# Altium PCB Inverter_Control.PcbDoc (part 1 of 2)
Units mm, origin at the board's own origin, x right, y up, seen from the top; angles counter-clockwise.
Board outline 150 x 40 mm, 4 copper layers (TOP, GND, PWR, BOT), stack 1.44 mm thick; 99 components, 92 nets, 378 pads, 6 vias.
Unrouted connection lines stored in the file: 133.
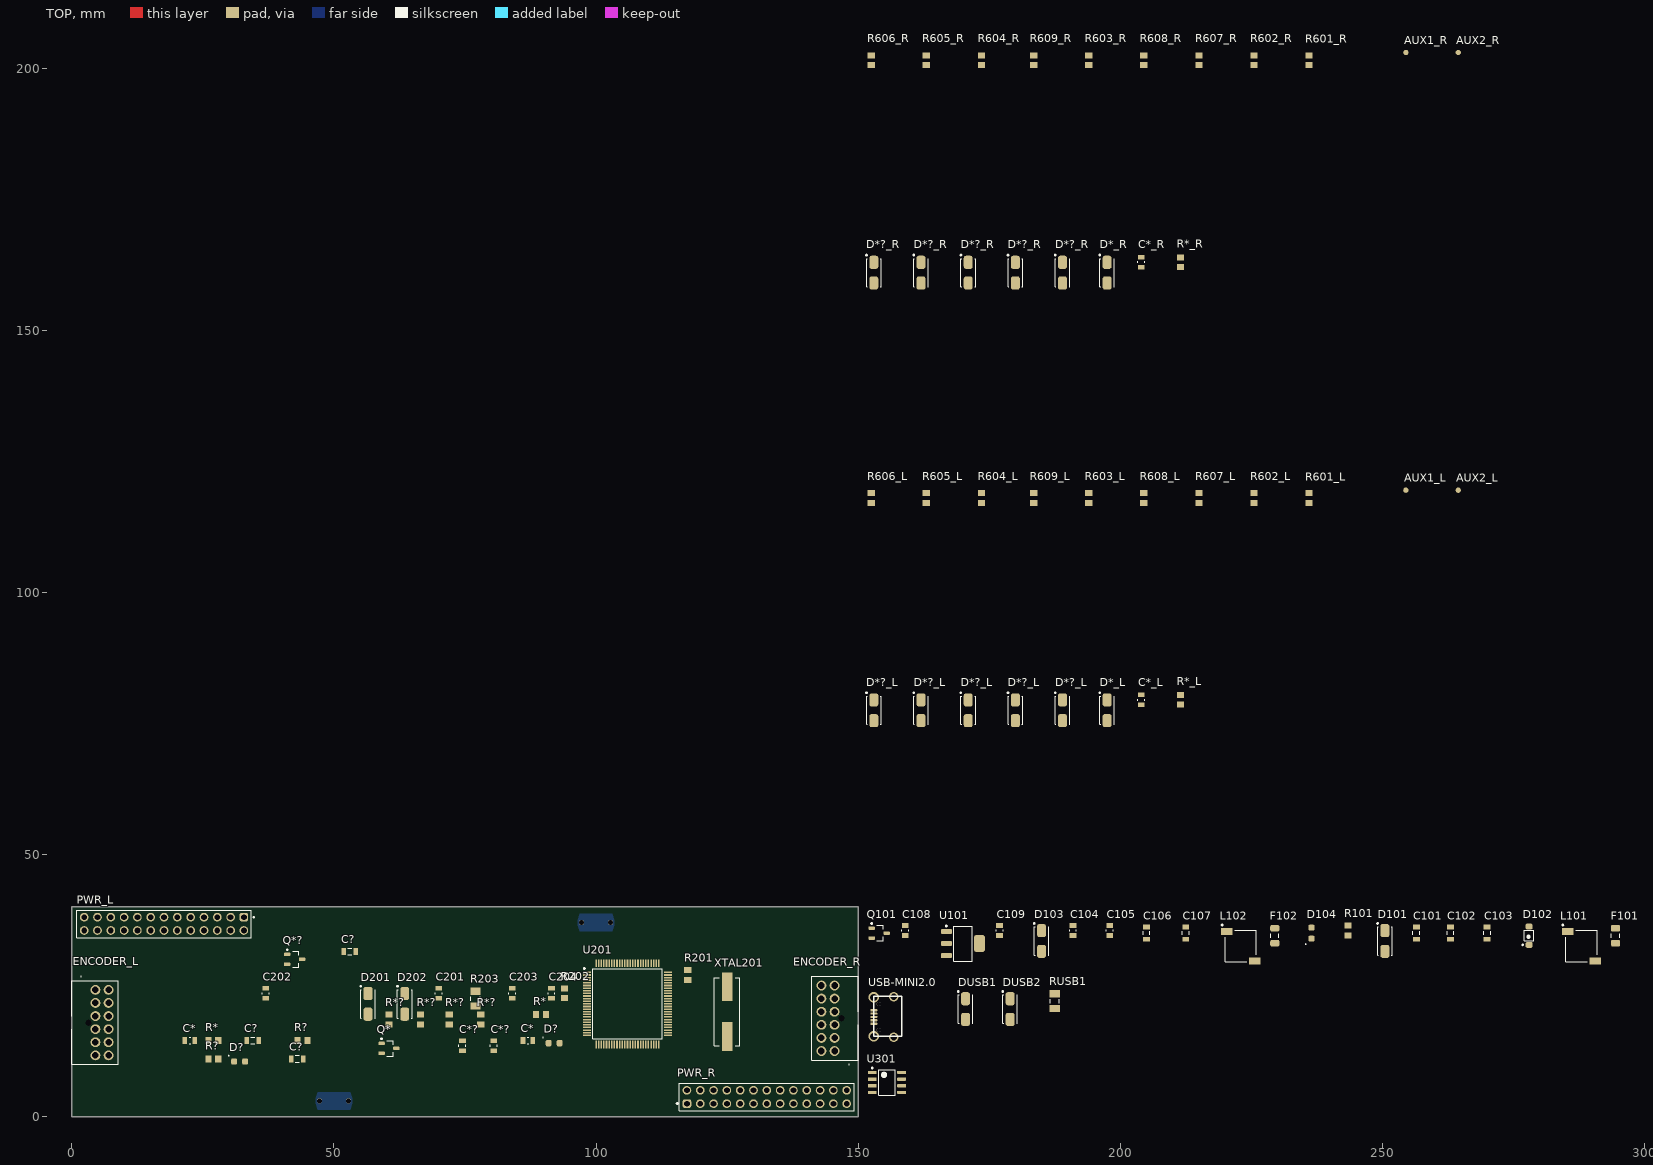
[diagram p0: TOP view]
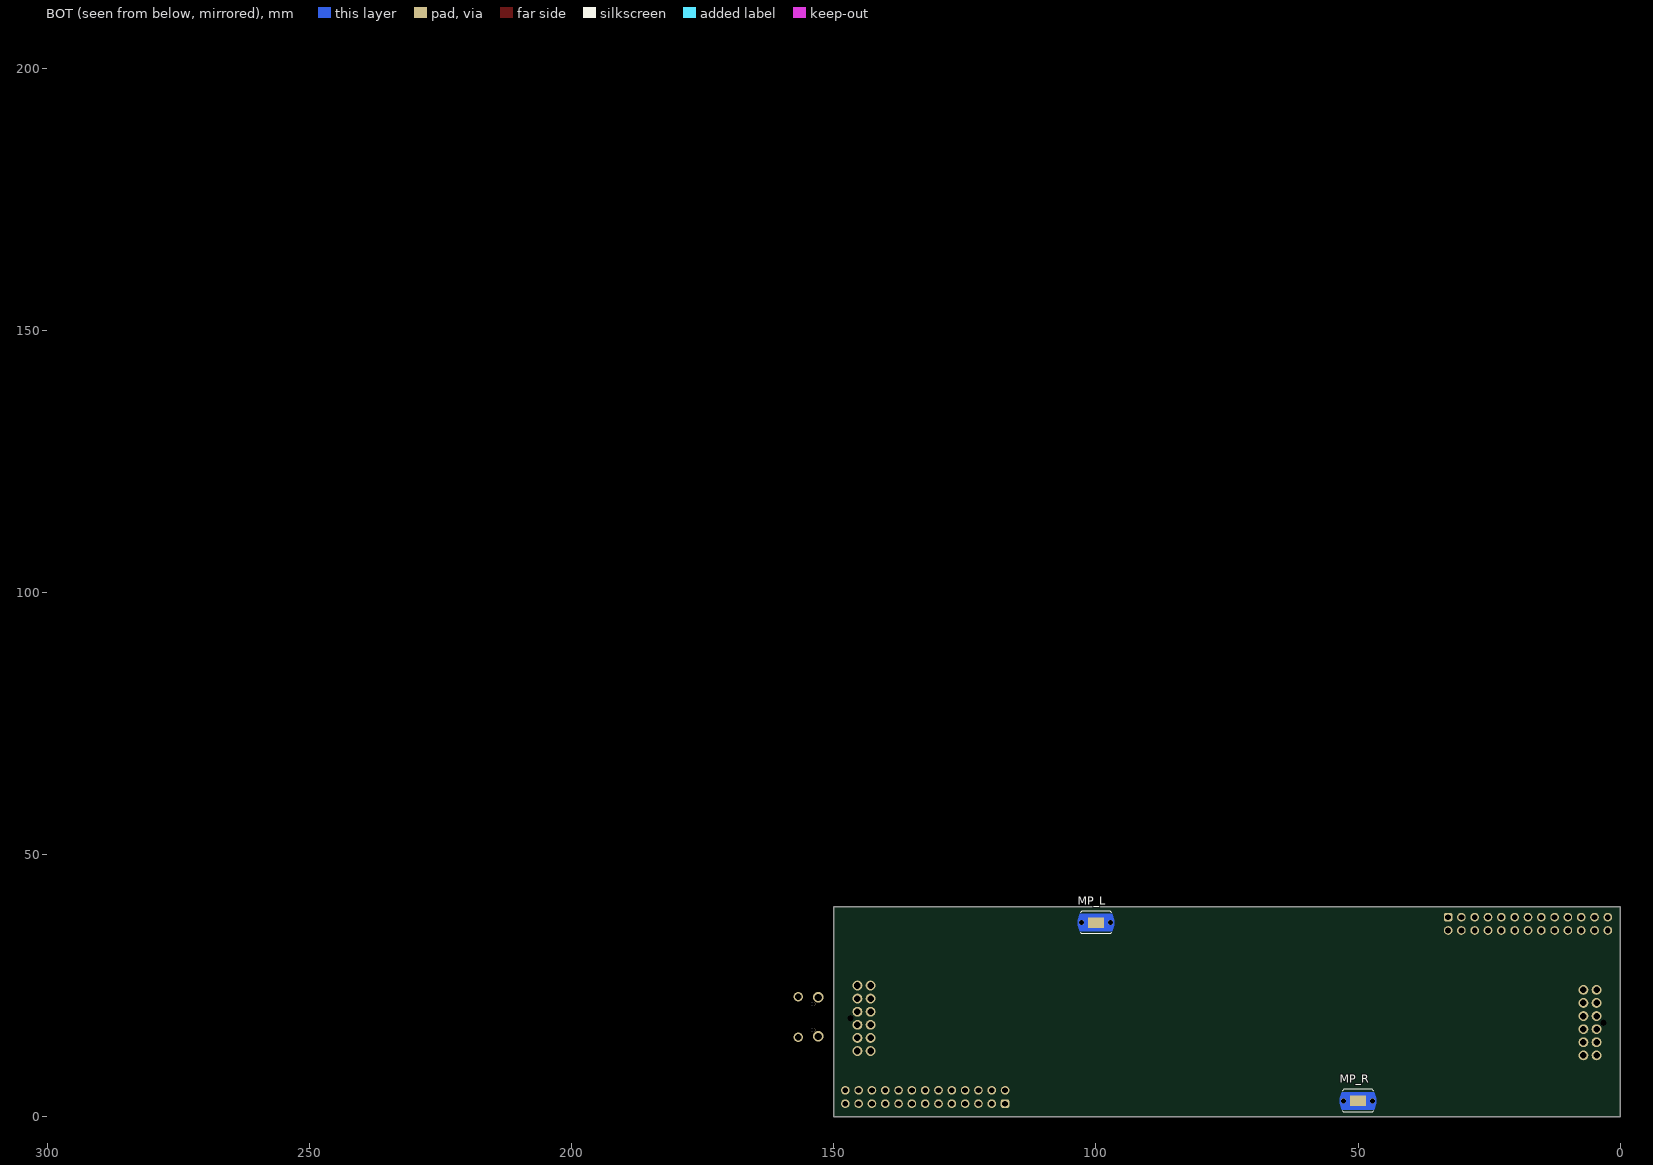
[diagram p1: BOT view, seen from below]

## Layer stack, top to bottom
Top Solder: solder mask 0.01, Solder Resist, Dk 3.5
TOP: signal copper 0.035
Dielectric 2: prepreg 0.1, PP-006, Dk 4.1
Dielectric 4: prepreg 0.1, PP-006, Dk 4.1
GND: signal copper 0.035
Dielectric 1: dielectric 0.9, FR-4, Dk 4.8
PWR: signal copper 0.035
Dielectric 5: prepreg 0.1, PP-006, Dk 4.1
Dielectric 3: prepreg 0.1, PP-006, Dk 4.1
BOT: signal copper 0.035
Bottom Solder: solder mask 0.01, Solder Resist, Dk 3.5

## Board outline
0,0 0,40 150,40 150,0

## Design rules (kind name [scope] priority, off if disabled: settings)
Clearance Clearance_TS [InNet('TS+') OR InNet('TS-') OR InNet('A_in') OR InNet('B_in') OR InNet('C_in') OR InNet('NetCsn_HS_A_1') OR InNet('NetCsn_HS_B_1') OR InNet('NetCsn_HS_C_1') OR InNet('NetCsn_LS_A_1') OR InNet('NetCsn_LS_B_1') OR InNet('NetCsn_LS_C_1') OR InNet('NetD501_K') OR InNet('NetQ501_D')] p1: gap=0.2 ignorepadtopadclearanceinfootprint=FALSE except(2: Via-Fill Via-Poly Via-Region; 3: Arc-Fill Arc-Poly Arc-Region Track-Fill Track-Poly Track-Region SMDPad-Fill SMDPad-Poly SMDPad-Region THPad-Fill THPad-Poly THPad-Region Fill-Fill Fill-Poly Fill-Region Poly-Poly Poly-Region Region-Region)
Clearance [All] p2: gap=0.2 ignorepadtopadclearanceinfootprint=FALSE
ComponentClearance [All] p1: gap=0.5 collisioncheckmode=3 verticalgap=0.5 showdistances=FALSE
DiffPairsRouting [All] p1: maxlimit=0.254 minlimit=0.254 mostfreqgap=0.254 toplayer_minwidth=0.381 toplayer_maxwidth=0.381 toplayer_prefwidth=0.381 midlayer1_minwidth=0.381 midlayer1_maxwidth=0.381 midlayer1_prefwidth=0.381 midlayer2_minwidth=0.381 midlayer2_maxwidth=0.381 midlayer2_prefwidth=0.381 bottomlayer_minwidth=0.381 bottomlayer_maxwidth=0.381 bottomlayer_prefwidth=0.381 maxuncoupledlength=12.7
Height [All] p1: minheight=0 maxheight=50 prefheight=12.7
HoleSize [All] p1: absolutevalues=TRUE maxlimit=10 minlimit=0.1 maxpercent=80.000 minpercent=20.000
HoleToHoleClearance [All] p1: gap=0.5 allowstackedmicrovias=TRUE
MinimumSolderMaskSliver [All] p1: minsoldermaskwidth=0
PolygonConnect [All] p1: connectstyle=Relief reliefconductorwidth=0.254 reliefentries=4 polygonreliefangle="90 Angle" airgapwidth=0.254
RoutingVias [All] p1: holewidth=0.5 width=1 viastyle="Through Hole" minholewidth=0.2 minwidth=0.5 maxholewidth=5 maxwidth=5
SilkToSilkClearance [All] p1: silktosilkclearance=0
SilkToSolderMaskClearance [IsPad] p1: minsilkscreentomaskgap=0 clearancetoexposedcopper=TRUE
SolderMaskExpansion [All] p1: expansion=0.102 istentingtop=FALSE
Width [All] p1: maxlimit=20 minlimit=0.2 preferedwidth=0.2
22 further rules are at their usual default settings.

## Classes and differential pairs
channel class "[6] Power_AFE": L R
channel class "[4] Encoder": L R
component class Supply: C101 C102 C103 C104 C105 C106 C107 C108 C109 D101 D102 D103 D104 F101 F102 L101 L102 Q101 R101 U101
component class R: AUX1_R AUX2_R PWR_R R601_R R602_R R603_R R604_R R605_R R606_R R607_R R608_R R609_R
component class L: AUX1_L AUX2_L PWR_L R601_L R602_L R603_L R604_L R605_L R606_L R607_L R608_L R609_L
component class Inverter_Control: DUSB1 DUSB2 MP_L MP_R RUSB1 USB-MINI2.0
component class CAN: C* C*? C? D? L? Q* Q*? R* R*? R? U301
component class MCU: C201 C202 C203 C204 D201 D202 R201 R202 R203 U201 XTAL201
differential pair USB_OTG: +USB_OTG_H -USB_OTG_L
differential pair CAN1: +CAN1_H -CAN1_L

## Components (designator, comment, footprint, x,y, rotation, side; value= is the part's Value field where it differs from the comment)
AUX1_L "TestPoint" TestPoint 254.499,119.5 r90 top (schematic designator AUX1)
AUX1_R "TestPoint" TestPoint 254.499,203 r90 top (schematic designator AUX1)
AUX2_L "TestPoint" TestPoint 264.499,119.5 r90 top (schematic designator AUX2)
AUX2_R "TestPoint" TestPoint 264.499,203 r90 top (schematic designator AUX2)
C101 "10uF" C0805FNPC-W 256.499,35 r90 top
C102 "10uF" C0805FNPC-W 262.999,35 r90 top
C103 "10uF" C0805FNPC-W 269.999,35 r90 top
C104 "885012207098" C0805FNPC-R 191,35.5 r90 top
C105 "885012207103" C0805FNPC-R 198,35.5 r90 top
C106 "10uF" C0805FNPC-W 205,35 r90 top
C107 "10uF" C0805FNPC-W 212.5,35 r90 top
C108 "885012107014" C0805FNPC-R 159,35.5 r90 top
C109 "885012107014" C0805FNPC-R 177,35.5 r90 top
C201 "885012007052" C0805FNPC-R 70,23.5 r90 top
C202 "885012007052" C0805FNPC-R 37,23.5 r90 top
C203 "885012207098" C0805FNPC-R 84,23.5 r90 top
C204 "885012207103" C0805FNPC-R 91.499,23.5 r90 top
C* "885012207103" C0805FNPC-R 86.999,14.5 r0 top
C* "885012207098" C0805FNPC-R 22.499,14.5 r0 top
C*? "885012207103" C0805FNPC-R 74.499,13.5 r90 top
C*? "885012207098" C0805FNPC-R 80.499,13.5 r90 top
C*_L "885012207092" C0805FNPC-R 204,79.5 r90 top (schematic designator C*)
C*_R "885012207092" C0805FNPC-R 204,163 r90 top (schematic designator C*)
C? "885012007057" C0805FNPC-W 42.999,11 r0 top
C? "885012007057" C0805FNPC-W 53,31.5 r0 top
C? "885012007057" C0805FNPC-W 34.499,14.5 r0 top
D101 "824501261" DTVS-DO-214AC 250.499,33.5 r90 top
D102 "MBR0530" DSC-SOD123 277.999,34.5 r90 top
D103 "824501131" DTVS-DO-214AC 185,33.5 r90 top
D104 "150080GS75000" LED_0805_WE 236.5,35 r90 top
D201 "824501600" DTVS-DO-214AC 56.5,21.5 r90 top
D202 "824501600" DTVS-DO-214AC 63.5,21.5 r90 top
D*?_L "824501600" DTVS-DO-214AC 162,77.5 r90 top (schematic designator D*?)
D*?_L "824501600" DTVS-DO-214AC 180,77.5 r90 top (schematic designator D*?)
D*?_L "824501600" DTVS-DO-214AC 171,77.5 r90 top (schematic designator D*?)
D*?_L "824501600" DTVS-DO-214AC 189,77.5 r90 top (schematic designator D*?)
D*?_L "824501600" DTVS-DO-214AC 153,77.5 r90 top (schematic designator D*?)
D*?_R "824501600" DTVS-DO-214AC 162,161 r90 top (schematic designator D*?)
D*?_R "824501600" DTVS-DO-214AC 189,161 r90 top (schematic designator D*?)
D*?_R "824501600" DTVS-DO-214AC 153,161 r90 top (schematic designator D*?)
D*?_R "824501600" DTVS-DO-214AC 171,161 r90 top (schematic designator D*?)
D*?_R "824501600" DTVS-DO-214AC 180,161 r90 top (schematic designator D*?)
D*_L "824501600" DTVS-DO-214AC 197.5,77.5 r90 top (schematic designator D*)
D*_R "824501600" DTVS-DO-214AC 197.5,161 r90 top (schematic designator D*)
D? "150080YS75000" LED_0805_WE 32,10.5 r0 top
D? "150080YS75000" LED_0805_WE 91.999,14 r0 top
DUSB1 "824501600" DTVS-DO-214AC 170.5,20.5 r90 top
DUSB2 "824501600" DTVS-DO-214AC 179,20.5 r90 top
ENCODER_L "1053101112" J_NanoFit_2x6_V 4.5,24.17 r90 top (schematic designator ENCODER)
ENCODER_R "1053101112" J_NanoFit_2x6_V 145.5,12.5 r270 top (schematic designator ENCODER)
F101 "0437001.WRA" Fuse_1206 294.499,34.5 r90 top
F102 "0437001.WRA" Fuse_1206 229.5,34.5 r90 top
L101 "47uH" L_47u-490mA_CF 287.999,32.5 r0 top
L102 "47uH" L_47u-490mA_CF 223,32.5 r0 top
MP_L "M3" 7466313 100,37 r0 bottom
MP_R "M3" 7466313 50,3 r0 bottom
PWR_L "61302621121" 61302621121 17.58,36.77 r180 top (schematic designator PWR)
PWR_R "61302621121" 61302621121 132.58,3.73 r0 top (schematic designator PWR)
Q101 "BSS308PE" TRT-PCH-2/30-BSS 154,35 r0 top
Q* "CPH3455-TL-H" TRT-NCH-3/35-CPH 60.499,13 r0 top
Q*? "CPH3455-TL-H" TRT-NCH-3/35-CPH 42.5,30 r0 top
R101 "CR0805-FX-1000ELF" R0805FTK 243.5,35.5 r90 top
R201 "620kR" R0805FTK 117.499,27 r90 top
R202 "430kR" R0805FTK 93.999,23.5 r90 top
R203 "CRCW12061K60FKEA" R1206FTK-W 77,22.5 r90 top
R601_L "CR0805-JW-103ELF" R0805FTK 236,118 r90 top (schematic designator R601)
R601_R "CR0805-JW-103ELF" R0805FTK 236,201.5 r90 top (schematic designator R601)
R602_L "CR0805-JW-103ELF" R0805FTK 225.5,118 r90 top (schematic designator R602)
R602_R "CR0805-JW-103ELF" R0805FTK 225.5,201.5 r90 top (schematic designator R602)
R603_L "CR0805-JW-103ELF" R0805FTK 194,118 r90 top (schematic designator R603)
R603_R "CR0805-JW-103ELF" R0805FTK 194,201.5 r90 top (schematic designator R603)
R604_L "CR0805-JW-103ELF" R0805FTK 173.5,118 r90 top (schematic designator R604)
R604_R "CR0805-JW-103ELF" R0805FTK 173.5,201.5 r90 top (schematic designator R604)
R605_L "CR0805-JW-103ELF" R0805FTK 163,118 r90 top (schematic designator R605)
R605_R "CR0805-JW-103ELF" R0805FTK 163,201.5 r90 top (schematic designator R605)
R606_L "CR0805-JW-103ELF" R0805FTK 152.5,118 r90 top (schematic designator R606)
R606_R "CR0805-JW-103ELF" R0805FTK 152.5,201.5 r90 top (schematic designator R606)
R607_L "CPF0805B15RE" R0805FTK 215,118 r90 top (schematic designator R607)
R607_R "CPF0805B15RE" R0805FTK 215,201.5 r90 top (schematic designator R607)
R608_L "CPF0805B15RE" R0805FTK 204.5,118 r90 top (schematic designator R608)
R608_R "CPF0805B15RE" R0805FTK 204.5,201.5 r90 top (schematic designator R608)
R609_L "CPF0805B15RE" R0805FTK 183.5,118 r90 top (schematic designator R609)
R609_R "CPF0805B15RE" R0805FTK 183.5,201.5 r90 top (schematic designator R609)
R* "CR0805-JW-102ELF" R0805FTK 89.5,19.5 r0 top
R* "CR0805-JW-103ELF" R0805FTK 26.999,14.5 r0 top
R*? "CR0805-JW-102ELF" R0805FTK 78,18.5 r90 top
R*? "CR0805-JW-103ELF" R0805FTK 72,18.5 r90 top
R*? "CR0805-JW-103ELF" R0805FTK 60.5,18.5 r90 top
R*? "CR0805-JW-103ELF" R0805FTK 66.5,18.5 r90 top
R*_L "CR0805-FX-1000ELF" R0805FTK 211.5,79.5 r90 top (schematic designator R*)
R*_R "CR0805-FX-1000ELF" R0805FTK 211.5,163 r90 top (schematic designator R*)
R? "R60-0805FTN" R0805FTK 27,11 r0 top value=60R
R? "R60-0805FTN" R0805FTK 43.999,14.5 r0 top value=60R
RUSB1 "CRCW12061K60FKEA" R1206FTK-W 187.5,22 r90 top
U101 "LM1117IMP-3.3/NOPB" LDO_10V-0.8/3V3-SOT223 170,33 r0 top
U201 "STM32F777VIT6" QFP50P1600X1600X160-100N 106,21.5 r0 top
U301 "MCP2551 I/SN" "SOIC, 8-Leads 1,27mm" 155.5,6.5 r0 top
USB-MINI2.0 "629105150521" USB_MINI2.0 153,19 r90 top
XTAL201 "830028710" XTAL20M_SMD 125,20 r90 top

## Footprints (in the part's own frame and the unit in brackets; to place one, negate y for a bottom-side part, rotate by r counter-clockwise, add the part's x,y. Pads: shape width x height; smd on the part's side, far side on the other; paste and mask are expansions set on the pad)
7466313 [mm] "SMD Terminal Right Angled with Pins, Thread M3, Length 5.5mm"
  rect 3x2 smd paste-403.566 mask-403.566: 1(0,0)
  round 0.97 hole 0.97 unplated paste-2539.97: MH1(-2.77,0) MH2(2.77,0)
  TOP region: -3.079,-1.665 3.079,-1.665 3.079,-1.665 3.5,0 3.079,1.665 3.079,1.665 3.079,1.665 -3.079,1.665 -3.079,1.665 -3.5,0 -3.079,-1.665
  silkscreen extent -2.92,-2.16 2.92,2.17, body extent -3.5,-2.16 3.5,2.17, height 7
61302621121 [mm] "Pin Header, pitch 2.54 mm, THT, Vertical, dual row, 26p"
  rrect50% 1.65x1.65 hole 1.1: 1(-15.24,-1.27)
  round 1.65 hole 1.1: 2(-15.24,1.27) 3(-12.7,-1.27) 4(-12.7,1.27) 5(-10.16,-1.27) 6(-10.16,1.27) 7(-7.62,-1.27) 8(-7.62,1.27) 9(-5.08,-1.27) 10(-5.08,1.27) 11(-2.54,-1.27) 12(-2.54,1.27) 13(0,-1.27) 14(0,1.27) 15(2.54,-1.27) 16(2.54,1.27) 17(5.08,-1.27) 18(5.08,1.27) 19(7.62,-1.27) 20(7.62,1.27) 21(10.16,-1.27) 22(10.16,1.27) 23(12.7,-1.27) 24(12.7,1.27) 25(15.24,-1.27) 26(15.24,1.27)
  silkscreen extent -17.24,-2.62 16.66,2.62, body extent -16.51,-2.54 16.51,2.54, height 8.59
C0805FNPC-R [mm]
  rect 0.9x1.3 smd: 1(-0.95,0) 2(0.95,0)
  silkscreen extent -0.15,-0.65 0.15,0.65, body extent -1.03,-0.63 0.97,0.63, height 0.96
C0805FNPC-W [mm]
  rect 0.9x1.3 smd: 1(-1.15,0) 2(1.15,0)
  silkscreen extent -0.35,-0.65 0.35,0.65, body extent -1,-0.63 1,0.63, height 0.96
DSC-SOD123 [mm] "SOIC, 2-Leads, Body 1,60x2,69mm, Pitch 1,27mm, IPC Low Density"
  rrect50% 1.1x1.3 smd: A(1.75,0) K(-1.75,0)
  silkscreen extent -1.87,-0.9 1,1.32, body extent -1.86,-0.8 1.86,0.8, height 1.36
DTVS-DO-214AC [mm] "Molded Diode, 2-Leads, Body 5,11x2,67mm, IPC Medium Density"
  rrect50% 2.5x1.7 smd: 1(-1.975,0) 2(1.975,0)
  silkscreen extent -2.7,-1.4 3.47,1.52, body extent -2.56,-1.34 2.56,1.34, height 2.5
Fuse_1206 [mm] "Chip Resistor, 2-Leads, Body 3,20x1,58mm, IPC Medium Density"
  rrect50% 1.25x1.75 smd: 1(-1.425,0) 2(1.425,0)
  silkscreen extent -0.4,-0.77 0.4,0.77, body extent -1.6,-0.79 1.6,0.79, height 0.86
J_NanoFit_2x6_V [mm]
  round 1.875 hole 1.25: 1(0,0) 2(-2.5,0) 3(-5,0) 4(-7.5,0) 5(-10,0) 6(-12.5,0) 7(0,-2.5) 8(-2.5,-2.5) 9(-5,-2.5) 10(-7.5,-2.5) 11(-10,-2.5) 12(-12.5,-2.5)
  round 0.675 hole 1.2 unplated: MH1(-6.25,1.34)
  silkscreen extent -14.22,-4.35 2.6,4.49, body extent -14.19,-4.26 1.75,4.58, height 10.68
L_47u-490mA_CF [mm] "Precision Wire Wound Inductor, 2-Leads, Body 5,80x5,80mm, IPC Medium Density"
  rect 2.2x1.3 smd: 1(-2.65,2.825) 2(2.643,-2.832)
  silkscreen extent -3.67,-3 3,4.17, body extent -3,-3 3,3, height 2.5
LDO_10V-0.8/3V3-SOT223 [mm] "SOT223, 4-Leads, Body 6,50x7,00mm (avg), Pitch 2,30mm, IPC Low Density"
  rrect50% 2.1x1 smd: 1(-3.15,2.3) 2(-3.15,0) 3(-3.15,-2.3)
  rrect50% 2.1x3.3 smd: 4(3.15,0)
  silkscreen extent -3.27,-3.35 1.8,3.47, body extent -3.5,-3.25 3.5,3.25, height 1.81
LED_0805_WE [mm] "SODFL, 2-Leads, Body 1,60x3,20mm, IPC Medium Density"
  rrect50% 1.1x1.2 smd: A(1.05,0) K(-1.05,0)
  silkscreen extent -2.15,1.05 -2.05,1.15, body extent -1,-0.62 1,0.63, height 0.7
QFP50P1600X1600X160-100N [mm]
  rect 1.475x0.3 smd: 1(-7.738,6) 2(-7.738,5.5) 3(-7.738,5) 4(-7.738,4.5) 5(-7.738,4) 6(-7.738,3.5) 7(-7.738,3) 8(-7.738,2.5) 9(-7.738,2) 10(-7.738,1.5) 11(-7.738,1) 12(-7.738,0.5) 13(-7.738,0) 14(-7.738,-0.5) 15(-7.738,-1) 16(-7.738,-1.5) 17(-7.738,-2) 18(-7.738,-2.5) 19(-7.738,-3) 20(-7.738,-3.5) 21(-7.738,-4) 22(-7.738,-4.5) 23(-7.738,-5) 24(-7.738,-5.5) 25(-7.738,-6) 51(7.738,-6) 52(7.738,-5.5) 53(7.738,-5) 54(7.738,-4.5) 55(7.738,-4) 56(7.738,-3.5) 57(7.738,-3) 58(7.738,-2.5) 59(7.738,-2) 60(7.738,-1.5) 61(7.738,-1) 62(7.738,-0.5) 63(7.738,0) 64(7.738,0.5) 65(7.738,1) 66(7.738,1.5) 67(7.738,2) 68(7.738,2.5) 69(7.738,3) 70(7.738,3.5) 71(7.738,4) 72(7.738,4.5) 73(7.738,5) 74(7.738,5.5) 75(7.738,6)
  rect 0.3x1.475 smd: 26(-6,-7.738) 27(-5.5,-7.738) 28(-5,-7.738) 29(-4.5,-7.738) 30(-4,-7.738) 31(-3.5,-7.738) 32(-3,-7.738) 33(-2.5,-7.738) 34(-2,-7.738) 35(-1.5,-7.738) 36(-1,-7.738) 37(-0.5,-7.738) 38(0,-7.738) 39(0.5,-7.738) 40(1,-7.738) 41(1.5,-7.738) 42(2,-7.738) 43(2.5,-7.738) 44(3,-7.738) 45(3.5,-7.738) 46(4,-7.738) 47(4.5,-7.738) 48(5,-7.738) 49(5.5,-7.738) 50(6,-7.738) 76(6,7.738) 77(5.5,7.738) 78(5,7.738) 79(4.5,7.738) 80(4,7.738) 81(3.5,7.738) 82(3,7.738) 83(2.5,7.738) 84(2,7.738) 85(1.5,7.738) 86(1,7.738) 87(0.5,7.738) 88(0,7.738) 89(-0.5,7.738) 90(-1,7.738) 91(-1.5,7.738) 92(-2,7.738) 93(-2.5,7.738) 94(-3,7.738) 95(-3.5,7.738) 96(-4,7.738) 97(-4.5,7.738) 98(-5,7.738) 99(-5.5,7.738) 100(-6,7.738)
  silkscreen extent -8.35,-6.65 6.65,6.87, body extent -8.1,-8.1 8.1,8.1, height 1.6
R0805FTK [mm] "Chip Resistor, 2-Leads, Body 2,00x1,25mm, IPC Medium Density"
  rect 1.15x1.35 smd: 1(-0.925,0) 2(0.925,0)
  body extent -1,-0.63 1,0.63, height 0.65
R1206FTK-W [mm] "Chip Resistor, 2-Leads, Body 3,15x1,60mm, IPC Medium Density"
  rect 1.4x1.95 smd: 1(-1.4,0) 2(1.4,0)
  silkscreen extent -0.4,-0.87 0.4,0.87, body extent -1.58,-0.8 1.58,0.8, height 0.61
"SOIC, 8-Leads 1,27mm" [mm] "SOIC, 8-Leads, Body 4,90x3,90mm, Pitch 1,27mm, IPC Low Density"
  rrect50% 1.7x0.65 smd: 1(-2.8,1.905) 2(-2.8,0.635) 3(-2.8,-0.635) 4(-2.8,-1.905) 5(2.8,-1.905) 6(2.8,-0.635) 7(2.8,0.635) 8(2.8,1.905)
  silkscreen extent -2.92,-2.45 1.55,2.9, body extent -2.98,-2.43 3.02,2.47, height 1.76
TestPoint [mm]
  round 1 smd: 1(0,0)
TRT-NCH-3/35-CPH [mm] "SOT23, 3-Leads, Body 2,90x2,80mm, Pitch 0,95mm, IPC Low Density"
  rrect50% 1.25x0.65 smd: D(1.425,0) G(-1.425,0.95) S(-1.425,-0.95)
  silkscreen extent -1.55,-1.5 0.8,1.95, body extent -1.4,-1.45 1.4,1.45, height 1.06
TRT-PCH-2/30-BSS [mm] "SOT23, 3-Leads, Body 2,90x2,80mm, Pitch 0,95mm, IPC Low Density"
  rrect50% 1.25x0.65 smd: D(1.425,0) G(-1.425,0.95) S(-1.425,-0.95)
  silkscreen extent -1.55,-1.5 0.8,1.95, body extent -1.4,-1.45 1.4,1.45, height 1.06
USB_MINI2.0 [mm]
  rrect50% 0.45x1.3 smd: 1(-1.3,0) 2(-0.65,0) 3(0,0) 4(0.65,0) 5(1.3,0)
  silkscreen extent -3.73,-5.33 3.91,0, body extent -4,-6.05 4,0.55, height 2.74
XTAL20M_SMD [mm]
  rect 5.5x2 smd: 1(-4.75,0) 2(4.75,0)
  silkscreen extent -6.5,-2.45 6.5,2.45, body extent -6.65,-2.47 6.65,2.48, height 4.3

## Part data
AUX1_L AUX1_R AUX2_L AUX2_R: "Test Point 1x1 mm", .Creator=GP, .PCBcheck=GP, .SCHcheck=GP, Category=TestPoint
C101 C102 C103 C106 C107: library part C10uF-50V-0805FNPC
C104 C203 C* C*?: library part C100n-50V-0805FNPC-X7R, "Cap, 0.1ΜF, 50V, 10%, X7R, 0805", Capacitance=100nF, Case Code (Imperial)=0805, Case Code (Metric)=2012, Dielectric=X7R, Manufacturer 1="Wurth Electronics", Max Operating Temperature=125°C, Min Operating Temperature=-55°C, Supplier Part Number 1=1813493, TOLERANCE=10%, Voltage Rating=50V, .Creator=DR, Case/Package=0805, Category="Ceramic Capacitors", ComponentLink1Description=http://www.farnell.com/datasheets/1958498.pdf?src-supplier=Farnell, ComponentLink1URL=http://www.farnell.com/datasheets/1958498.pdf?src-supplier=Farnell, ComponentLink2Description=http://www.farnell.com/datasheets/1958498.pdf?src-supplier=Element14, ComponentLink2URL=http://www.farnell.com/datasheets/1958498.pdf?src-supplier=Element14, ComponentLink3Description=https://katalog.we-online.de/pbs/datasheet/885012207098.pdf?src-supplier=Digi-Key, ComponentLink3URL=https://katalog.we-online.de/pbs/datasheet/885012207098.pdf?src-supplier=Digi-Key, ComponentLink4Description=http://www.farnell.com/datasheets/1958498.pdf?src-supplier=Newark, ComponentLink4URL=http://www.farnell.com/datasheets/1958498.pdf?src-supplier=Newark, Length=0.079inch, Manufacturer Part Number 1=885012207098, Mount="Surface Mount", Packaging="Cut Tape", Pricing 1="100=0,10200, 500=0,07100, 2000=0,06100 (GBP)", REACH SVHC=Unknown, RoHS=Yes, RoHS Compliant=Yes, Stock 1=8000, Supplier 1=RSComponents, Thickness=0.035inch, Voltage Rating (DC)=50V, Width=0.049inch
C105 C204 C* C*?: library part C1u-50V-0805FNPC-X7R, "Multilayer Ceramic Capacitor, Wcap-Csgp Series, 1 F, 10%, X7R, 50 V, 0805 [2012 Metric] Rohs Compliant: Yes", Capacitance=1uF, Case Code (Imperial)=0805, Case Code (Metric)=2012, Dielectric=X7R, Manufacturer 1="Wurth Electronics", Max Operating Temperature=85°C, Min Operating Temperature=-55°C, Supplier Part Number 1=1813523, TOLERANCE=10%, Voltage Rating=50V, .Creator=GP, Case/Package=0805, Category="Ceramic Capacitors", ComponentLink1Description=http://www.farnell.com/datasheets/1958501.pdf?src-supplier=Farnell, ComponentLink1URL=http://www.farnell.com/datasheets/1958501.pdf?src-supplier=Farnell, ComponentLink2Description=http://www.farnell.com/datasheets/1958501.pdf?src-supplier=Element14, ComponentLink2URL=http://www.farnell.com/datasheets/1958501.pdf?src-supplier=Element14, ComponentLink3Description=https://katalog.we-online.de/pbs/datasheet/885012107003.pdf?src-supplier=Digi-Key, ComponentLink3URL=https://katalog.we-online.de/pbs/datasheet/885012107003.pdf?src-supplier=Digi-Key, ComponentLink4Description=http://www.farnell.com/datasheets/1958501.pdf?src-supplier=Newark, ComponentLink4URL=http://www.farnell.com/datasheets/1958501.pdf?src-supplier=Newark, Length=0.079inch, Manufacturer Part Number 1=885012207103, Mount="Surface Mount", Packaging="Cut Tape", Pricing 1="50=0,27200, 250=0,25300, 500=0,22800, 1250=0,20100, 2500=0,17100 (GBP)", REACH SVHC=Unknown, RoHS=Yes, RoHS Compliant=Yes, Stock 1=5100, Supplier 1=RSComponents, Thickness=0.053inch, Voltage Rating (DC)=50V, Width=0.049inch
C108 C109: library part C10u-16V-0805FNPC-X5R, "Multilayer Ceramic Capacitor, Wcap-Csgp Series, 10 F, 20%, X5R, 16 V, 0805 [2012 Metric] Rohs Compliant: Yes", Capacitance=10uF, Case Code (Imperial)=0805, Case Code (Metric)=2012, Dielectric=X5R, Manufacturer 1="Wurth Electronics", Max Operating Temperature=85°C, Min Operating Temperature=-55°C, Supplier Part Number 1=1813526, TOLERANCE=20%, Voltage Rating=16V, .Creator=DR, Case/Package=0805, Category="Ceramic Capacitors", ComponentLink1Description=http://www.farnell.com/datasheets/1958454.pdf?src-supplier=Farnell, ComponentLink1URL=http://www.farnell.com/datasheets/1958454.pdf?src-supplier=Farnell, ComponentLink2Description=http://www.farnell.com/datasheets/1958454.pdf?src-supplier=Element14, ComponentLink2URL=http://www.farnell.com/datasheets/1958454.pdf?src-supplier=Element14, ComponentLink3Description=https://katalog.we-online.de/pbs/datasheet/885012107014.pdf?src-supplier=Digi-Key, ComponentLink3URL=https://katalog.we-online.de/pbs/datasheet/885012107014.pdf?src-supplier=Digi-Key, ComponentLink4Description=http://www.farnell.com/datasheets/1958454.pdf?src-supplier=Newark, ComponentLink4URL=http://www.farnell.com/datasheets/1958454.pdf?src-supplier=Newark, Length=0.079inch, Manufacturer Part Number 1=885012107014, Mount="Surface Mount", Packaging="Cut Tape", Pricing 1="50=0,21000, 250=0,20200, 500=0,19100, 1000=0,17400, 2500=0,14700 (GBP)", REACH SVHC=Unknown, RoHS=Yes, RoHS Compliant=Yes, Stock 1=81550, Supplier 1=RSComponents, Thickness=0.057inch, Voltage Rating (DC)=16V, Width=0.049inch
C201 C202: library part C15p-50V-0805FNPC-NP0, "Cap, 15PF, 50V, 5%, C0G/NP0, 0805", Capacitance=15pF, Case Code (Imperial)=0805, Case Code (Metric)=2012, Manufacturer 1="Wurth Electronics", Max Operating Temperature=125°C, Min Operating Temperature=-55°C, Supplier Part Number 1=15AC9316, TOLERANCE=5%, Voltage Rating=50V, .Creator=DR, Case/Package=0805, Category="Ceramic Capacitors", ComponentLink1Description=http://www.farnell.com/datasheets/2031702.pdf?src-supplier=Farnell, ComponentLink1URL=http://www.farnell.com/datasheets/2031702.pdf?src-supplier=Farnell, ComponentLink2Description=http://katalog.we-online.de/pbs/datasheet/885012007052.pdf?src-supplier=Digi-Key, ComponentLink2URL=http://katalog.we-online.de/pbs/datasheet/885012007052.pdf?src-supplier=Digi-Key, ComponentLink3Description=https://katalog.we-online.de/pbs/datasheet/885012007052.pdf?src-supplier=Digi-Key, ComponentLink3URL=https://katalog.we-online.de/pbs/datasheet/885012007052.pdf?src-supplier=Digi-Key, Length=0.079inch, Manufacturer Part Number 1=885012007052, Mount="Surface Mount", Packaging="Cut Tape", Pricing 1="1=0,10800, 10=0,05200, 25=0,05100, 50=0,04900, 100=0,04800, 250=0,04600, 500=0,04300 (USD)", RoHS=Yes, RoHS Compliant=Yes, Stock 1=815, Supplier 1=Newark, Thickness=0.028inch, Width=0.049inch
C*_L C*_R: library part C10n-50V-0805FNPC-X7R, "Cap, 0.01ΜF, 50V, 10%, X7R, 0805", Capacitance=10nF, Case Code (Imperial)=0805, Case Code (Metric)=2012, Dielectric=X7R, Manufacturer 1="Wurth Electronics", Max Operating Temperature=125°C, Min Operating Temperature=-55°C, Supplier Part Number 1=1813941, TOLERANCE=10%, Voltage Rating=50V, .Creator=DR, Case/Package=0805, Category="Ceramic Capacitors", ComponentLink1Description=http://www.farnell.com/datasheets/1958497.pdf?src-supplier=Farnell, ComponentLink1URL=http://www.farnell.com/datasheets/1958497.pdf?src-supplier=Farnell, ComponentLink2Description=http://www.farnell.com/datasheets/1958497.pdf?src-supplier=Element14, ComponentLink2URL=http://www.farnell.com/datasheets/1958497.pdf?src-supplier=Element14, ComponentLink3Description=http://www.farnell.com/datasheets/1958497.pdf?src-supplier=Newark, ComponentLink3URL=http://www.farnell.com/datasheets/1958497.pdf?src-supplier=Newark, ComponentLink4Description=https://katalog.we-online.de/pbs/datasheet/885012207092.pdf?src-supplier=Digi-Key, ComponentLink4URL=https://katalog.we-online.de/pbs/datasheet/885012207092.pdf?src-supplier=Digi-Key, Length=0.079inch, Manufacturer Part Number 1=885012207092, Mount="Surface Mount", Packaging="Cut Tape", Pricing 1="4000=0,03200, 12000=0,03100 (USD)", REACH SVHC=Unknown, RoHS=Yes, RoHS Compliant=Yes, Stock 1=1, Supplier 1=RSComponents, Thickness=0.035inch, Voltage Rating (DC)=50V, Width=0.049inch
C? C? C?: library part C100p-50V-0805FNPC-C0G/NP0, "Multilayer Ceramic Capacitor, Wcap-Csgp Series, 100 Pf, 5%, C0G / Np0, 50 V, 0805 [2012 Metric] Rohs Compliant: Yes", Capacitance=100pF, Case Code (Imperial)=0805, Case Code (Metric)=2012, Dielectric=C0G, Manufacturer="Wurth Electronics", Max Operating Temperature=125°C, Min Operating Temperature=-55°C, Supplier Part Number 1=1813930, TOLERANCE=5%, Voltage Rating=50V, .Creator=DR, Case/Package=0805, Category="Ceramic Capacitors", ComponentLink1Description=http://www.farnell.com/datasheets/1958443.pdf?src-supplier=Farnell, ComponentLink1URL=http://www.farnell.com/datasheets/1958443.pdf?src-supplier=Farnell, ComponentLink2Description=https://katalog.we-online.de/pbs/datasheet/885012007057.pdf?src-supplier=Digi-Key, ComponentLink2URL=https://katalog.we-online.de/pbs/datasheet/885012007057.pdf?src-supplier=Digi-Key, ComponentLink3Description=http://www.farnell.com/datasheets/1958443.pdf?src-supplier=Element14, ComponentLink3URL=http://www.farnell.com/datasheets/1958443.pdf?src-supplier=Element14, ComponentLink4Description=http://www.farnell.com/datasheets/1958443.pdf?src-supplier=Newark, ComponentLink4URL=http://www.farnell.com/datasheets/1958443.pdf?src-supplier=Newark, ComponentLink5Description="Where buy it", ComponentLink5URL=https://www.we-online.com/catalog/en/WCAP-CSGP-50VDC#885012007057, Length=0.079inch, Manufacturer Part Number=885012007057, Mount="Surface Mount", Packaging="Cut Tape", Pricing 1="4000=0,03900, 12000=0,03800 (USD)", REACH SVHC=Unknown, RoHS=Yes, RoHS Compliant=Yes, Stock 1=1, Supplier 1=RSComponents, Thickness=0.035inch, Voltage Rating (DC)=50V, Width=0.049inch
D101: library part DTVS-26V-DO-214AC, "TVS diode [Würth Elektronik] 824501261 TVS diode", Clamping Voltage=42.1V, Manufacturer="Wurth Electronics", Max Breakdown Voltage=30.4V, Max Operating Temperature=150°C, Min Operating Temperature=-65°C, Peak Pulse Current=9.5A, Peak Pulse Power=400W, Power Line Protection=No, Resistor Type=Zener, Reverse Standoff Voltage=26V, Supplier Part Number 1=9217305, .Creator=DO, Category="TVS Diodes", ComponentLink1Description=http://www.farnell.com/datasheets/2036389.pdf?src-supplier=Farnell, ComponentLink1URL=http://www.farnell.com/datasheets/2036389.pdf?src-supplier=Farnell, ComponentLink2Description=http://www.farnell.com/datasheets/2036389.pdf?src-supplier=Element14, ComponentLink2URL=http://www.farnell.com/datasheets/2036389.pdf?src-supplier=Element14, ComponentLink3Description=https://katalog.we-online.de/pbs/datasheet/824501261.pdf?src-supplier=Digi-Key, ComponentLink3URL=https://katalog.we-online.de/pbs/datasheet/824501261.pdf?src-supplier=Digi-Key, ComponentLink4Description="Where buy it", ComponentLink4URL=https://www.we-online.com/catalog/en/WE-TVSP?sq=824501261#824501261, Manufacturer Part Number=824501261, Min Breakdown Voltage=30.4V, Mount="Surface Mount", Number of Bidirectional Channels=1, Number of Pins=2, Packaging="Cut Tape", Polarity=Bidirectional, Pricing 1="50=0,29400, 250=0,26100, 500=0,21200, 1000=0,20100, 2000=0,19600 (USD)", REACH SVHC=Unknown, RoHS=Yes, RoHS Compliant=Yes, Stock 1=1, Supplier 1=RSComponents
D102: library part DSC-0.5/30-SOD123, "VR=30V IF=500mA 30pF P=410mW", Average Rectified Current=500mA, Forward Voltage=430mV, Max Forward Surge Current (Ifsm)=5.5A, Max Repetitive Reverse Voltage (Vrrm)=30V, Max Reverse Current=130uA, Package Quantity=1, Supplier Part Number 1=15R3453, .Creator=GP, Category=Diode, ComponentLink1Description=Datasheet, ComponentLink2Description="Where buy it", ComponentLink3Description=https://datasheet.ciiva.com/30479/0900766b810e2512-30479401.pdf?src-supplier=RSComponents, ComponentLink3URL=https://datasheet.ciiva.com/30479/0900766b810e2512-30479401.pdf?src-supplier=RSComponents, ComponentLink4Description=https://datasheet.ciiva.com/34301/974753-34301826.pdf?src-supplier=Jameco, ComponentLink4URL=https://datasheet.ciiva.com/34301/974753-34301826.pdf?src-supplier=Jameco, ComponentLink5Description=https://datasheet.ciiva.com/910/mbr0530-910516.pdf?src-supplier=Digi-Key, ComponentLink5URL=https://datasheet.ciiva.com/910/mbr0530-910516.pdf?src-supplier=Digi-Key, ComponentLink6Description=https://datasheet.ciiva.com/25931/mbr0530-25931989.pdf?src-supplier=Avnet+Europe, ComponentLink6URL=https://datasheet.ciiva.com/25931/mbr0530-25931989.pdf?src-supplier=Avnet+Europe, ComponentLink7Description=https://datasheet.ciiva.com/8300/mbr0530-8300905.pdf?src-supplier=Avnet, ComponentLink7URL=https://datasheet.ciiva.com/8300/mbr0530-8300905.pdf?src-supplier=Avnet, ComponentLink8Description=https://datasheet.ciiva.com/17318/mbr0530-17318568.pdf?src-supplier=Future+Electronics, ComponentLink8URL=https://datasheet.ciiva.com/17318/mbr0530-17318568.pdf?src-supplier=Future+Electronics, ComponentLink9Description=https://datasheet.ciiva.com/15144/getdatasheetpartid-86760-15144598.pdf?src-supplier=Verical, ComponentLink9URL=https://datasheet.ciiva.com/15144/getdatasheetpartid-86760-15144598.pdf?src-supplier=Verical, ComponentLink10Description=https://datasheet.ciiva.com/910/mbr0530-910518.pdf?src-supplier=Digi-Key, ComponentLink10URL=https://datasheet.ciiva.com/910/mbr0530-910518.pdf?src-supplier=Digi-Key, Contact Plating=Tin,Matte, Current Rating=500mA, Element Configuration=Single, Forward Current=500mA, Height=1.03mm, Lead Free="Lead Free", Length=2.7mm, Max Reverse Leakage Current=130uA, Max Reverse Voltage (DC)=30V, Max Surge Current=5.5A, Mount="Surface Mount", Output Current=500mA, Peak Non-Repetitive Surge Current=5.5A, Polarity=Standard, Pricing 1="1=0,34400, 10=0,23900, 100=0,12200, 500=0,10000 (USD)", Radiation Hardening=No, REACH SVHC="No SVHC", RoHS Compliant=Yes, Series=-, Stock 1=9, Supplier 1=Newark, Voltage Rating (DC)=30V, Weight=0.03g, Width=1.6mm
D103: library part DTVS-13V-DO-214AC, "Tvs Diode, 400W, 13V, Bidir, DO-214AC", Clamping Voltage=21.5V, Manufacturer="Wurth Electronics", Max Breakdown Voltage=15.15V, Max Operating Temperature=150°C, Min Operating Temperature=-65°C, Peak Pulse Current=18.6A, Peak Pulse Power=400W, Power Line Protection=No, Resistor Type=Zener, Reverse Standoff Voltage=13V, Supplier Part Number 1=732-824501131CT-ND, .Creator=DO, Category="TVS Diodes", ComponentLink1Description=https://katalog.we-online.de/pbs/datasheet/824501131.pdf?src-supplier=Digi-Key, ComponentLink1URL=https://katalog.we-online.de/pbs/datasheet/824501131.pdf?src-supplier=Digi-Key, ComponentLink2Description=http://www.farnell.com/datasheets/2036399.pdf?src-supplier=Element14, ComponentLink2URL=http://www.farnell.com/datasheets/2036399.pdf?src-supplier=Element14, ComponentLink3Description="Where buy it", ComponentLink3URL=https://www.we-online.com/catalog/en/WE-TVSP?sq=824501131#824501131, Manufacturer Part Number=824501131, Min Breakdown Voltage=15.15V, Mount="Surface Mount", Number of Bidirectional Channels=1, Number of Pins=2, Packaging="Cut Tape", Polarity=Bidirectional, Pricing 1="1=0,27000 (USD)", REACH SVHC=Unknown, RoHS=Yes, RoHS Compliant=Yes, Stock 1=1000, Supplier 1=Digi-Key
D104: library part LEDGS-0805-450, "Led, Green, 520 Nm, 3.2 V, 30 Ma, 450 Mcd Rohs Compliant: Yes", Case Code (Imperial)=0805, Case Code (Metric)=2012, Color=Green, Forward Current=30mA, Forward Voltage=3.2V, Manufacturer 1="Wurth Electronics", Max Operating Temperature=85°C, Min Operating Temperature=-40°C, Package Quantity=4000, Supplier Part Number 1=8154221, Test Current=20mA, .Creator=GP, Case/Package=0805, Category=LEDs, ComponentLink1Description=Datasheet, ComponentLink1URL=https://www.we-online.com/catalog/datasheet/150080GS75000.pdf, ComponentLink2Description="Where buy it", ComponentLink2URL=https://katalog.we-online.de/en/led/WL-SMCW/150080GS75000, ComponentLink3Description=https://datasheet.ciiva.com/29563/150080gs75000-29563008.pdf?src-supplier=Digi-Key, ComponentLink3URL=https://datasheet.ciiva.com/29563/150080gs75000-29563008.pdf?src-supplier=Digi-Key, ComponentLink4Description=https://datasheet.ciiva.com/29279/759434-da-01-en-chipled-0805-w-kl-gruen-150080gs75000-29279039.pdf?src-supplier=Conrad, ComponentLink4URL=https://datasheet.ciiva.com/29279/759434-da-01-en-chipled-0805-w-kl-gruen-150080gs75000-29279039.pdf?src-supplier=Conrad, Dominant Wavelength=520nm, Height=0.7mm, Length=2mm, Lens Style=Clear,Rectangular, Luminous Intensity=450mcd, Manufacturer Part Number 1=150080GS75000, Mount="Surface Mount", Packaging="Cut Tape", Pricing 1="50=0,19300, 500=0,12900, 1000=0,12300, 2000=0,11700, 4000=0,11100 (USD)", REACH SVHC=Unknown, RoHS=Yes, RoHS Compliant=Yes, Stock 1=4350, Supplier 1=RSComponents, Viewing Angle=140°, Wavelength=520nm, Width=1.25mm
D201 D202 D*?_L D*?_L D*?_L D*?_L D*?_L D*?_R D*?_R D*?_R D*?_R D*?_R D*_L D*_R DUSB1 DUSB2: library part DTVS-6V-DO-214AC, "TVS diode [Würth Elektronik] 824501600 TVS diode", Clamping Voltage=10.3V, Manufacturer="Wurth Electronics", Max Breakdown Voltage=7.02V, Max Operating Temperature=150°C, Min Operating Temperature=-65°C, Peak Pulse Current=38.8A, Peak Pulse Power=400W, Power Line Protection=No, Resistor Type=Zener, Reverse Standoff Voltage=6V, Supplier Part Number 1=710-824501600, .Creator=DO, Category="TVS Diodes", ComponentLink1Description="Where buy it", ComponentLink1URL=https://www.we-online.com/catalog/en/WE-TVSP?sq=824501600#824501600, ComponentLink2Description=http://www.farnell.com/datasheets/2036401.pdf?src-supplier=Element14, ComponentLink2URL=http://www.farnell.com/datasheets/2036401.pdf?src-supplier=Element14, ComponentLink3Description=https://katalog.we-online.de/pbs/datasheet/824501600.pdf?src-supplier=Digi-Key, ComponentLink3URL=https://katalog.we-online.de/pbs/datasheet/824501600.pdf?src-supplier=Digi-Key, Manufacturer Part Number=824501600, Min Breakdown Voltage=7.02V, Mount="Surface Mount", Number of Bidirectional Channels=1, Number of Pins=2, Packaging="Cut Tape", Polarity=Bidirectional, Pricing 1="1=0,28000, 10=0,26100, 50=0,26100, 100=0,23400, 500=0,20400, 1000=0,17400, 10000=0,17400 (USD)", REACH SVHC=Unknown, RoHS=Yes, RoHS Compliant=Yes, Stock 1=780, Supplier 1=Mouser
D? D?: library part LEDYS-0805-120, "2 V Yellow LED 2012 (0805) SMD, Wurth Elektronik WL-SMCW 150080YS75000", Case Code (Imperial)=0805, Case Code (Metric)=2012, Color=Yellow, Forward Current=30mA, Forward Voltage=2V, Manufacturer 1="Wurth Electronics", Max Operating Temperature=85°C, Min Operating Temperature=-40°C, Package Quantity=4000, Supplier Part Number 1=8154231, Test Current=20mA, .Creator=DR, Case/Package=0805, Category=LEDs, ComponentLink1Description=Datasheet, ComponentLink1URL=https://www.we-online.com/catalog/datasheet/150080YS75000.pdf, ComponentLink2Description="Where buy it", ComponentLink2URL=https://katalog.we-online.de/en/led/WL-SMCW/150080YS75000, ComponentLink3Description=https://datasheet.ciiva.com/23843/150080ys75000-23843256.pdf?src-supplier=Newark, ComponentLink3URL=https://datasheet.ciiva.com/23843/150080ys75000-23843256.pdf?src-supplier=Newark, ComponentLink4Description=https://datasheet.ciiva.com/29279/759438-da-01-en-chipled-0805-w-kl-gelb-150080ys75000-29279034.pdf?src-supplier=Conrad, ComponentLink4URL=https://datasheet.ciiva.com/29279/759438-da-01-en-chipled-0805-w-kl-gelb-150080ys75000-29279034.pdf?src-supplier=Conrad, ComponentLink5Description=https://datasheet.ciiva.com/22656/1911353-22656971.pdf?src-supplier=Element14, ComponentLink5URL=https://datasheet.ciiva.com/22656/1911353-22656971.pdf?src-supplier=Element14, ComponentLink6Description=https://datasheet.ciiva.com/29563/150080ys75000-29563019.pdf?src-supplier=Digi-Key, ComponentLink6URL=https://datasheet.ciiva.com/29563/150080ys75000-29563019.pdf?src-supplier=Digi-Key, ComponentLink7Description=https://datasheet.ciiva.com/29563/150080ys75000-29563020.pdf?src-supplier=Digi-Key, ComponentLink7URL=https://datasheet.ciiva.com/29563/150080ys75000-29563020.pdf?src-supplier=Digi-Key, ComponentLink8Description=https://datasheet.ciiva.com/29563/150080ys75000-29563021.pdf?src-supplier=Digi-Key, ComponentLink8URL=https://datasheet.ciiva.com/29563/150080ys75000-29563021.pdf?src-supplier=Digi-Key, Dominant Wavelength=590nm, Height=0.7mm, Length=2mm, Lens Style=Clear,Rectangular, Luminous Intensity=120mcd, Manufacturer Part Number 1=150080YS75000, Mount="Surface Mount", Packaging="Tape and Reel", Pricing 1="50=0,19300, 500=0,12900, 750=0,12300, 1500=0,11700, 3000=0,11100 (USD)", REACH SVHC=Unknown, RoHS=Yes, RoHS Compliant=Yes, Stock 1=2100, Supplier 1=RSComponents, Viewing Angle=140°, Wavelength=590nm, Width=1.25mm
ENCODER_L ENCODER_R: library part J_NanoFit_2x6_V, "Nano-Fit Vertical Header, Through Hole, 2.50mm Pitch, Dual Row, 12 Circuits, with Kinked Pins, Tin (Sn) Plating, Black, Glow-Wire Capable, Tray"
F101 F102: library part Fuse_1A_63V_1206, "Fuse Chip Fast Acting 1A 63V SMD Solder Pad 1206 Ceramic T/R Automotive", Case Code (Imperial)=1206, Case Code (Metric)=3216, Current Rating=1A, Manufacturer=Littelfuse, Max Operating Temperature=150°C, Min Operating Temperature=-55°C, Supplier Part Number 1=F10001CT-ND, Voltage Rating (AC)=63V, .Creator=DO, Approvals=CSA,cURus, Case/Package=1206, Category=Fuses, ComponentLink1Description=https://www.littelfuse.com/~/media/electronics/datasheets/fuses/littelfuse_fuse_437a_datasheet.pdf.pdf?src-supplier=Digi-Key, ComponentLink1URL=https://www.littelfuse.com/~/media/electronics/datasheets/fuses/littelfuse_fuse_437a_datasheet.pdf.pdf?src-supplier=Digi-Key, ComponentLink2Description="Where buy it", ComponentLink2URL=https://www.mouser.es/ProductDetail/Littelfuse/0437001WRA?qs=DXv0QSHKF4z9CJhPXjxR%252BA%3D%3D, Fuse Type="Board Mount (Cartridge Style Excluded)", Manufacturer Part Number=0437001.WRA, Mount="Surface Mount", Packaging="Tape and Reel", Pricing 1="1=1,52000, 5=1,47000, 10=1,37600, 50=1,13860, 100=0,94880, 250=0,92508, 500=0,78276, 1000=0,68788 (USD)", RoHS=Yes, Stock 1=5820, Supplier 1=Digi-Key, Voltage Rating (DC)=63V
L101 L102: library part L_47u-490mA_CF, "Inductor Power Unshielded Wirewound 47uH 10% 100KHz Ferrite 490mA 546mOhm DCR T/R", Case/Package=Nonstandard, Current Rating=490mA, DC Resistance (DCR)=546mR, Manufacturer=Sumida, Manufacturer Part Number=CDC5D23BNP-470KC, Max Operating Temperature=100°C, Min Operating Temperature=-40°C, Package Quantity=2000, Supplier Part Number 1=851-CDC5D23BNP-470KC, Test Frequency=100kHz, TOLERANCE=10%, .Creator=GP, Category="Fixed Inductors", ComponentLink1Description=http://www.mouser.com/ds/2/390/CDC5D23B-465898.pdf?src-supplier=Mouser, ComponentLink1URL=http://www.mouser.com/ds/2/390/CDC5D23B-465898.pdf?src-supplier=Mouser, ComponentLink3Description=http://products.sumida.com/products/pdf/CDC5D23B.pdf?src-supplier=Digi-Key, ComponentLink3URL=http://products.sumida.com/products/pdf/CDC5D23B.pdf?src-supplier=Digi-Key, Core Material=Ferrite, Height=2.5mm, Height - Seated (Max)=0.098inch, Inductance=47uH, Lead Free="Lead Free", Length=0.228inch, Max DC Current=490mA, Mount="Surface Mount", Packaging="Tape and Reel", Pricing 1="1=0,95000, 10=0,71100, 50=0,71100, 100=0,59700, 1000=0,40600, 10000=0,38100 (USD)", RoHS=Yes, RoHS Compliant=Yes, Series=CDC5D23B, Shielding=Unshielded, Stock 1=3779, Supplier 1=Mouser, Termination=SMD/SMT, Weight=0.007584oz, Width=5.8mm
MP_L MP_R: library part 7466313, "WP-SMRA REDCUBE SMT Right Angled with pins, M3, 50A", Manufacturer="Wurth Elektronik", Operating Temperature Max=150°C, Operating Temperature Min=-55°C, Rated Current=50A, Category="REDCUBE SMT", ComponentLink1Description="Website Link", ComponentLink1URL=https://www.we-online.com/redexpert/article/7466313?ad, ComponentLink2Description="Datasheet Link", ComponentLink2URL=https://www.we-online.com/redexpert/spec/7466313?ad, Height=7mm, Manufacturer Part Number=7466313, Match Code=WP-SMRA, Material=Brass, Mount="Surface Mount", Packaging=Bulk, Surface=Tin, Thread Size=M3
PWR_L PWR_R: "WR-PHD Pin Header, THT, Vertical, pitch 2.54mm, 2 Row, 26P", Contact Resistance=20mOhm, Manufacturer="Wurth Elektronik", Operating Temperature Max=105°C, Operating Temperature Min=-40°C, Rated Current=3A, Withstanding Voltage=500V, Working Voltage=250V, Category="Board-to-Board Connectors", ComponentLink1Description="Website Link", ComponentLink1URL=https://www.we-online.com/redexpert/article/61302621121?ad, ComponentLink2Description="Datasheet Link", ComponentLink2URL=https://www.we-online.com/redexpert/spec/61302621121?ad, Gender="Pin Header", Manufacturer Part Number=61302621121, Match Code=WR-PHD, Mount="Through Hole", Number of Pins=26, Number of Rows=2, Orientation=Vertical, Packaging=Bag, Pitch=2.54mm
Q101: library part TRT-PCH-2/30-BSS, "Infineon’s highly innovative OptiMOS™ families include p-channel power MOSFETs, SOT-23-3, RoHS", Case/Package=TO-236-3, Continuous Drain Current (ID)=2A, Drain to Source Voltage (Vdss)=30V, Gate to Source Voltage (Vgs)=20V, Input Capacitance=500pF, Manufacturer=Infineon, Manufacturer Part Number=BSS308PEH6327, Max Operating Temperature=150°C, Max Power Dissipation=500mW, Min Operating Temperature=-55°C, Package Quantity=1, Supplier Part Number 1=8235500, Threshold Voltage=-1.5V, .Creator=DO, Category=MOSFETs, ComponentLink1Description=datasheet, ComponentLink1URL=https://datasheet.ciiva.com/6379/infineon-bss308pe-ds-v02-03-en-6379920.pdf?src-supplier=Digi-Key, ComponentLink2Description=https://datasheet.ciiva.com/11171/infineon-bss308pe-ds-v02-03-en-11171385.pdf?src-supplier=Avnet, ComponentLink2URL=https://datasheet.ciiva.com/11171/infineon-bss308pe-ds-v02-03-en-11171385.pdf?src-supplier=Avnet, Fall Time=2.8ns, Mount="Surface Mount", Number of Pins=3, Packaging="Tape and Reel", Pricing 1="50=0,50300, 100=0,26400, 250=0,25900, 500=0,25200, 1000=0,24700 (USD)", Rds On Max=80mR, REACH SVHC="No SVHC", Rise Time=7.7ns, RoHS=Yes, Series=OptiMOS™, Stock 1=4000, Supplier 1=RSComponents, Turn-Off Delay Time=15.3ns, Turn-On Delay Time=5.6ns
Q* Q*?: library part TRT-NCH-3/35-CPH, "CPH3455-TL-H N-channel MOSFET Transistor; 3 A; 35 V; 3-Pin CPH", Case/Package=SC, Continuous Drain Current (ID)=3A, Drain to Source Breakdown Voltage=35V, Drain to Source Resistance=108mR, Gate to Source Voltage (Vgs)=20V, Input Capacitance=186pF, Manufacturer="ON Semiconductor", Max Operating Temperature=150°C, Max Power Dissipation=1W, Min Operating Temperature=-55°C, Package Quantity=3000, Supplier Part Number 1=8009989, .Creator=GP, Category=Transistor, ComponentLink1Description=Datasheet, ComponentLink1URL=https://docs.rs-online.com/5847/0900766b812d514d.pdf, ComponentLink2Description="Where buy it", ComponentLink2URL=https://es.rs-online.com/web/p/mosfet/8009989, ComponentLink3Description=https://datasheet.ciiva.com/947/cph3455-d-947201.pdf?src-supplier=Digi-Key, ComponentLink3URL=https://datasheet.ciiva.com/947/cph3455-d-947201.pdf?src-supplier=Digi-Key, ComponentLink4Description=https://datasheet.ciiva.com/4444/cph3455-d-91653-4444616.pdf?src-supplier=Mouser, ComponentLink4URL=https://datasheet.ciiva.com/4444/cph3455-d-91653-4444616.pdf?src-supplier=Mouser, ComponentLink5Description=https://datasheet.ciiva.com/11164/cph3455-d-11164889.pdf?src-supplier=Avnet, ComponentLink5URL=https://datasheet.ciiva.com/11164/cph3455-d-11164889.pdf?src-supplier=Avnet, Drain to Source Voltage (Vdss)=35V, Element Configuration=Single, Fall Time=5.7ns, Halogen Free="Halogen Free", Height=0.9mm, Lead Free="Lead Free", Length=2.9mm, Manufacturer Part Number=CPH3455-TL-H, Number of Pins=3, Packaging="Tape and Reel", Polarity=N-CHANNEL, Power Dissipation=1W, Pricing 1="50=0,50400 (USD)", Rds On Max=104mR, Rise Time=4.7ns, RoHS=Yes, RoHS Compliant=Yes, Series=-, Stock 1=1, Supplier 1=RSComponents, Turn-Off Delay Time=15ns, Turn-On Delay Time=4.2ns, Width=1.6mm
R101 R*_L R*_R: library part R100-0805FTK, "Res Thick Film 0805 100 Ohm 1% 1/8W ±100ppm/°C Molded SMD SMD Paper Tape on Plastic Reel", Case Code (Imperial)=0805, Case Code (Metric)=2012, Manufacturer 1=Bourns, Max Operating Temperature=155°C, Max Power Dissipation=125mW, Min Operating Temperature=-55°C, Package Quantity=1, Resistance=100R, Resistance Tolerance=1%, Resistor Type="Thick Film", Temperature Coefficient=100ppm/°C, Voltage Rating=150V, .Creator=DR, Case/Package=0805, Category="Chip SMD Resistors", ComponentLink1Description=https://datasheet.ciiva.com/11809/0900766b80fcdb72-11809178.pdf?src-supplier=RSComponents, ComponentLink1URL=https://datasheet.ciiva.com/11809/0900766b80fcdb72-11809178.pdf?src-supplier=RSComponents, ComponentLink2Description=https://datasheet.ciiva.com/6547/chpreztr-6547413.pdf?src-supplier=Digi-Key, ComponentLink2URL=https://datasheet.ciiva.com/6547/chpreztr-6547413.pdf?src-supplier=Digi-Key, ComponentLink3Description=https://datasheet.ciiva.com/6547/chpreztr-6547414.pdf?src-supplier=Digi-Key, ComponentLink3URL=https://datasheet.ciiva.com/6547/chpreztr-6547414.pdf?src-supplier=Digi-Key, ComponentLink4Description=https://datasheet.ciiva.com/6547/chpreztr-6547415.pdf?src-supplier=Digi-Key, ComponentLink4URL=https://datasheet.ciiva.com/6547/chpreztr-6547415.pdf?src-supplier=Digi-Key, ComponentLink5Description=https://datasheet.ciiva.com/9120/chpreztr-9120744.pdf?src-supplier=Avnet, ComponentLink5URL=https://datasheet.ciiva.com/9120/chpreztr-9120744.pdf?src-supplier=Avnet, Construction=Rectangular, Contact Plating=Tin, Depth=1.25mm, Features="Moisture Resistant", Height=0.5mm, Length=2mm, Manufacturer Part Number 1=CR0805-FX-1000ELF, Military Standard=Not, Mount="Surface Mount", Number of Pins=2, Number of Terminations=2, Packaging="Tape and Reel", Power Rating=125mW, Pricing 1="1=0,05840, 10=0,03430, 25=0,01780, 100=0,00750, 250=0,00560, 500=0,00490, 3000=0,00470 (USD)", Radiation Hardening=No, REACH SVHC="No SVHC", RoHS=Yes, RoHS Compliant=Yes, Series=CR0805, Stock 1=49802, Supplier 1="Arrow Electronics", Supplier Part Number 1=CR0805-FX-1000ELF, Technology="THICK FILM", Termination=SMD/SMT, Thickness=508um, TOLERANCE=1%, Voltage Rating (DC)=150V, Width=1.25mm
R201: library part R620k-0805FTK
R202: library part R430k-0805FTK
R203 RUSB1: library part R1.6K-1206FTK, "Res Thick Film 1206 1.6K Ohm 1% 1/4W ±100ppm/°C Molded SMD SMD Paper T/R", Case Code (Imperial)=1206, Case Code (Metric)=3216, Manufacturer 1=Vishay, Max Operating Temperature=155°C, Max Power Dissipation=250mW, Min Operating Temperature=-55°C, Package Quantity=5000, Resistance=1k6, Resistance Tolerance=1%, Resistor Type="Thick Film", Supplier Part Number 1=541-1.60KFCT-ND, Temperature Coefficient=100ppm/°C, Voltage Rating=200V, .Creator=DO, Case/Package=1206, Category="Chip SMD Resistors", ComponentLink1Description=https://datasheet.ciiva.com/11811/0900766b80d98b5e-11811377.pdf?src-supplier=RSComponents, ComponentLink1URL=https://datasheet.ciiva.com/11811/0900766b80d98b5e-11811377.pdf?src-supplier=RSComponents, ComponentLink2Description=https://datasheet.ciiva.com/2515/dcrcwe3-2515616.pdf?src-supplier=Digi-Key, ComponentLink2URL=https://datasheet.ciiva.com/2515/dcrcwe3-2515616.pdf?src-supplier=Digi-Key, ComponentLink3Description=https://datasheet.ciiva.com/2515/dcrcwe3-2515617.pdf?src-supplier=Digi-Key, ComponentLink3URL=https://datasheet.ciiva.com/2515/dcrcwe3-2515617.pdf?src-supplier=Digi-Key, ComponentLink4Description=https://datasheet.ciiva.com/2515/dcrcwe3-2515618.pdf?src-supplier=Digi-Key, ComponentLink4URL=https://datasheet.ciiva.com/2515/dcrcwe3-2515618.pdf?src-supplier=Digi-Key, ComponentLink5Description=https://datasheet.ciiva.com/9098/dcrcwe3-9098889.pdf?src-supplier=Avnet, ComponentLink5URL=https://datasheet.ciiva.com/9098/dcrcwe3-9098889.pdf?src-supplier=Avnet, ComponentLink6Description=https://datasheet.ciiva.com/16213/dcrcwe3-16213498.pdf?src-supplier=Future+Electronics, ComponentLink6URL=https://datasheet.ciiva.com/16213/dcrcwe3-16213498.pdf?src-supplier=Future+Electronics, ComponentLink7Description=https://datasheet.ciiva.com/17203/dcrcwe3-17203786.pdf?src-supplier=Avnet+Europe, ComponentLink7URL=https://datasheet.ciiva.com/17203/dcrcwe3-17203786.pdf?src-supplier=Avnet+Europe, ComponentLink8Description=https://datasheet.ciiva.com/7670/1697337-7670316.pdf?src-supplier=Element14, ComponentLink8URL=https://datasheet.ciiva.com/7670/1697337-7670316.pdf?src-supplier=Element14, ComponentLink9Description=https://datasheet.ciiva.com/7670/1697337-7670317.pdf?src-supplier=Element14, ComponentLink9URL=https://datasheet.ciiva.com/7670/1697337-7670317.pdf?src-supplier=Element14, ComponentLink10Description=https://datasheet.ciiva.com/5550/dcrcwe3-109170-5550718.pdf?src-supplier=Mouser, ComponentLink10URL=https://datasheet.ciiva.com/5550/dcrcwe3-109170-5550718.pdf?src-supplier=Mouser, ComponentLink11Description=RS, ComponentLink11URL=https://es.rs-online.com/web/p/resistencias-fijas-para-montaje-en-superficie/6791866/, Construction=Rectangular, Contact Plating=Tin, Depth=1.6mm, Features="Automotive AEC-Q200", Height=0.55mm, Lead Free="Lead Free", Length=3.2mm, Manufacturer Part Number 1=CRCW12061K60FKEA, Military Standard=Not, Number of Pins=2, Number of Terminations=2, Packaging="Tape and Reel", Power Rating=250mW, Pricing 1="1=0,10000, 10=0,08200, 100=0,03160, 1000=0,01392, 2500=0,01202 (USD)", Radiation Hardening=No, REACH SVHC=Unknown, RoHS=Yes, RoHS Compliant=Yes, Series=CRCW, Size Code=1206, Supplier 1=Digi-Key, Technology="THICK FILM", Termination=SMD/SMT, TOLERANCE=1%, Voltage Rating (DC)=200V, Weight=0.000353oz, Width=0.063inch